# Altium PCB AQM with ESP32-S3.PcbDoc
Units mil, origin at the board's own origin, x right, y up, seen from the top; angles counter-clockwise.
Board outline 2620 x 2460 mil, 4 copper layers (Top Layer, Layer 1 - GND, Layer 2 - Power, Bottom Layer), stack 23.756 mil thick; 67 components, 54 nets, 235 pads, 1 vias.
Unrouted connection lines stored in the file: 162.
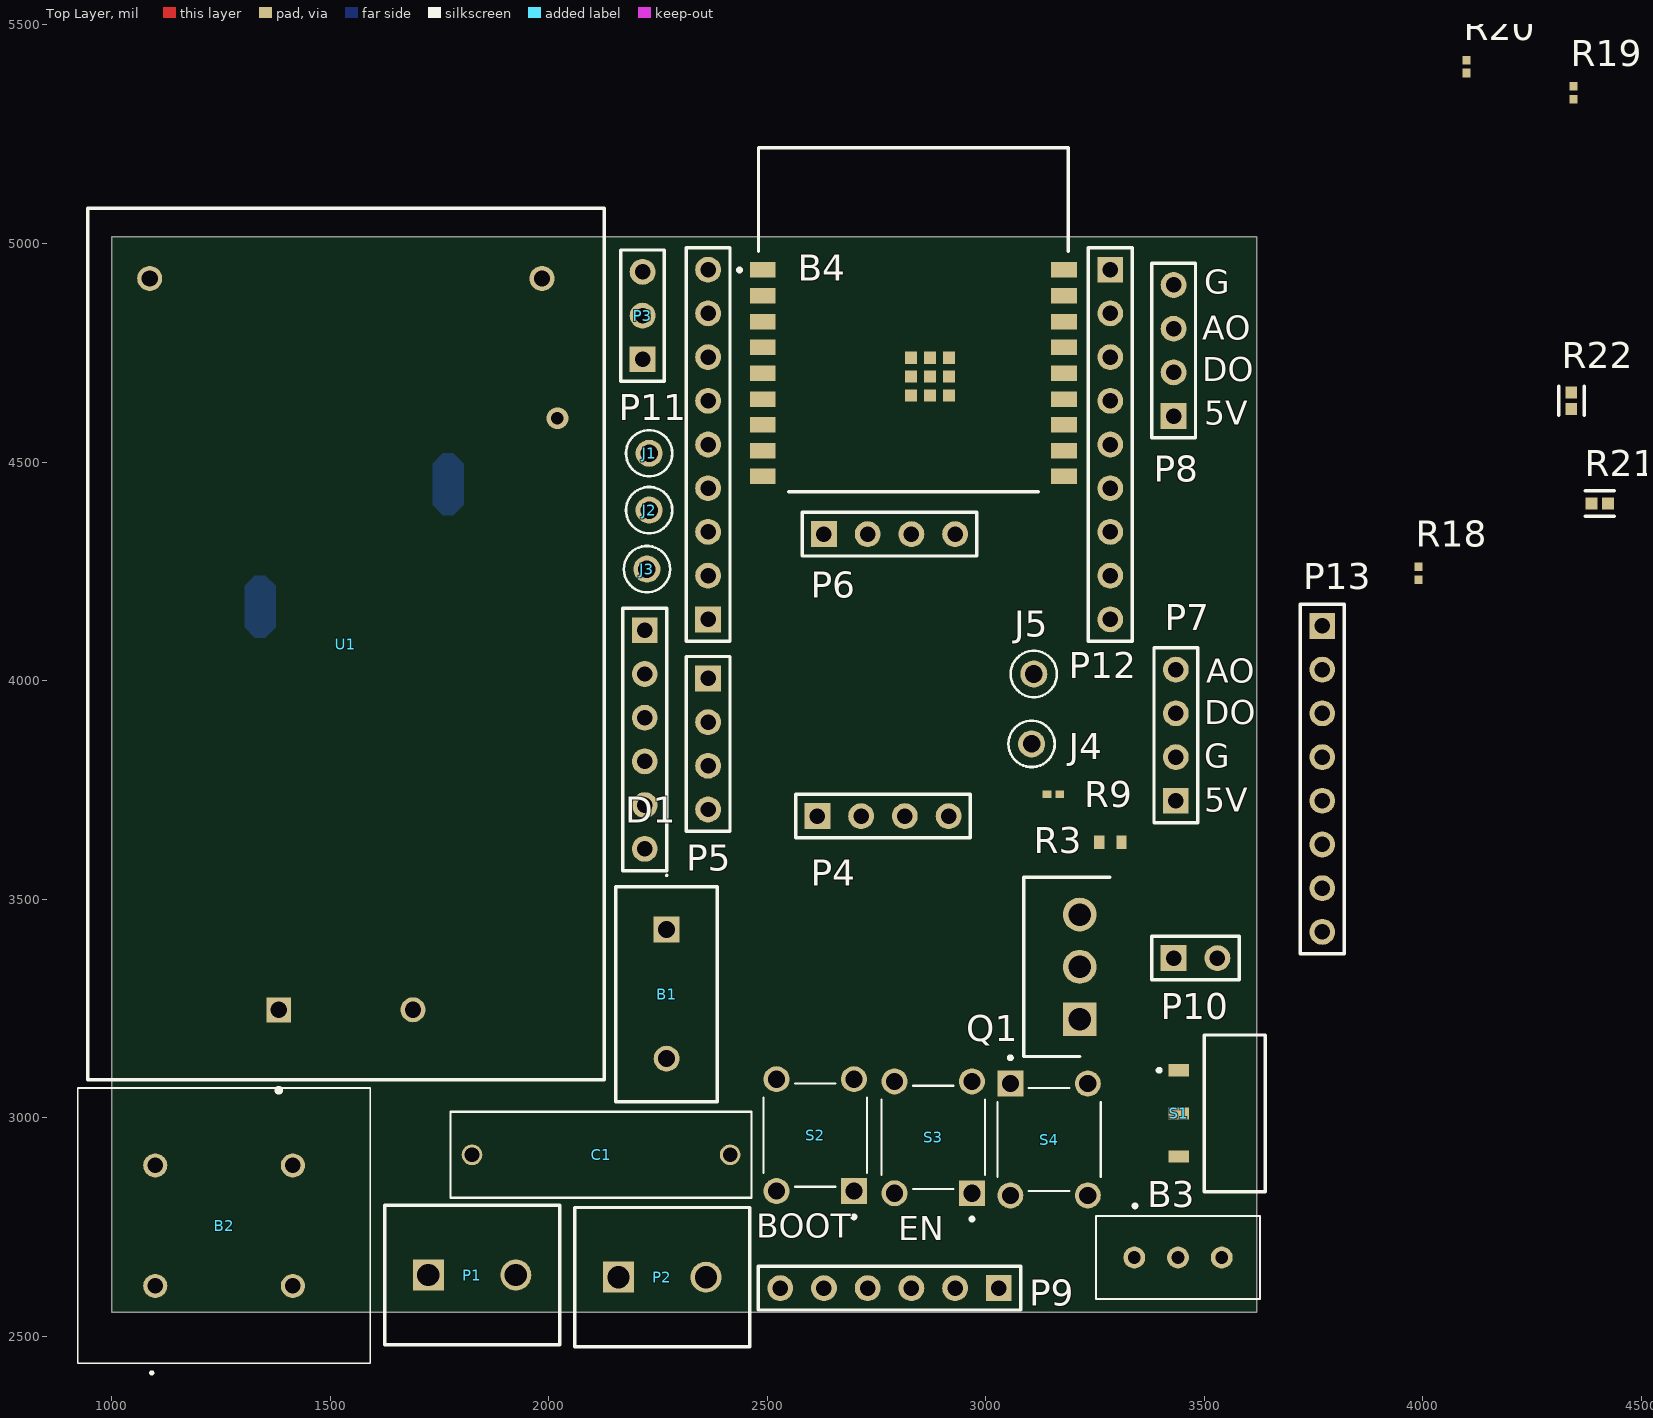
[diagram p0: Top Layer view]
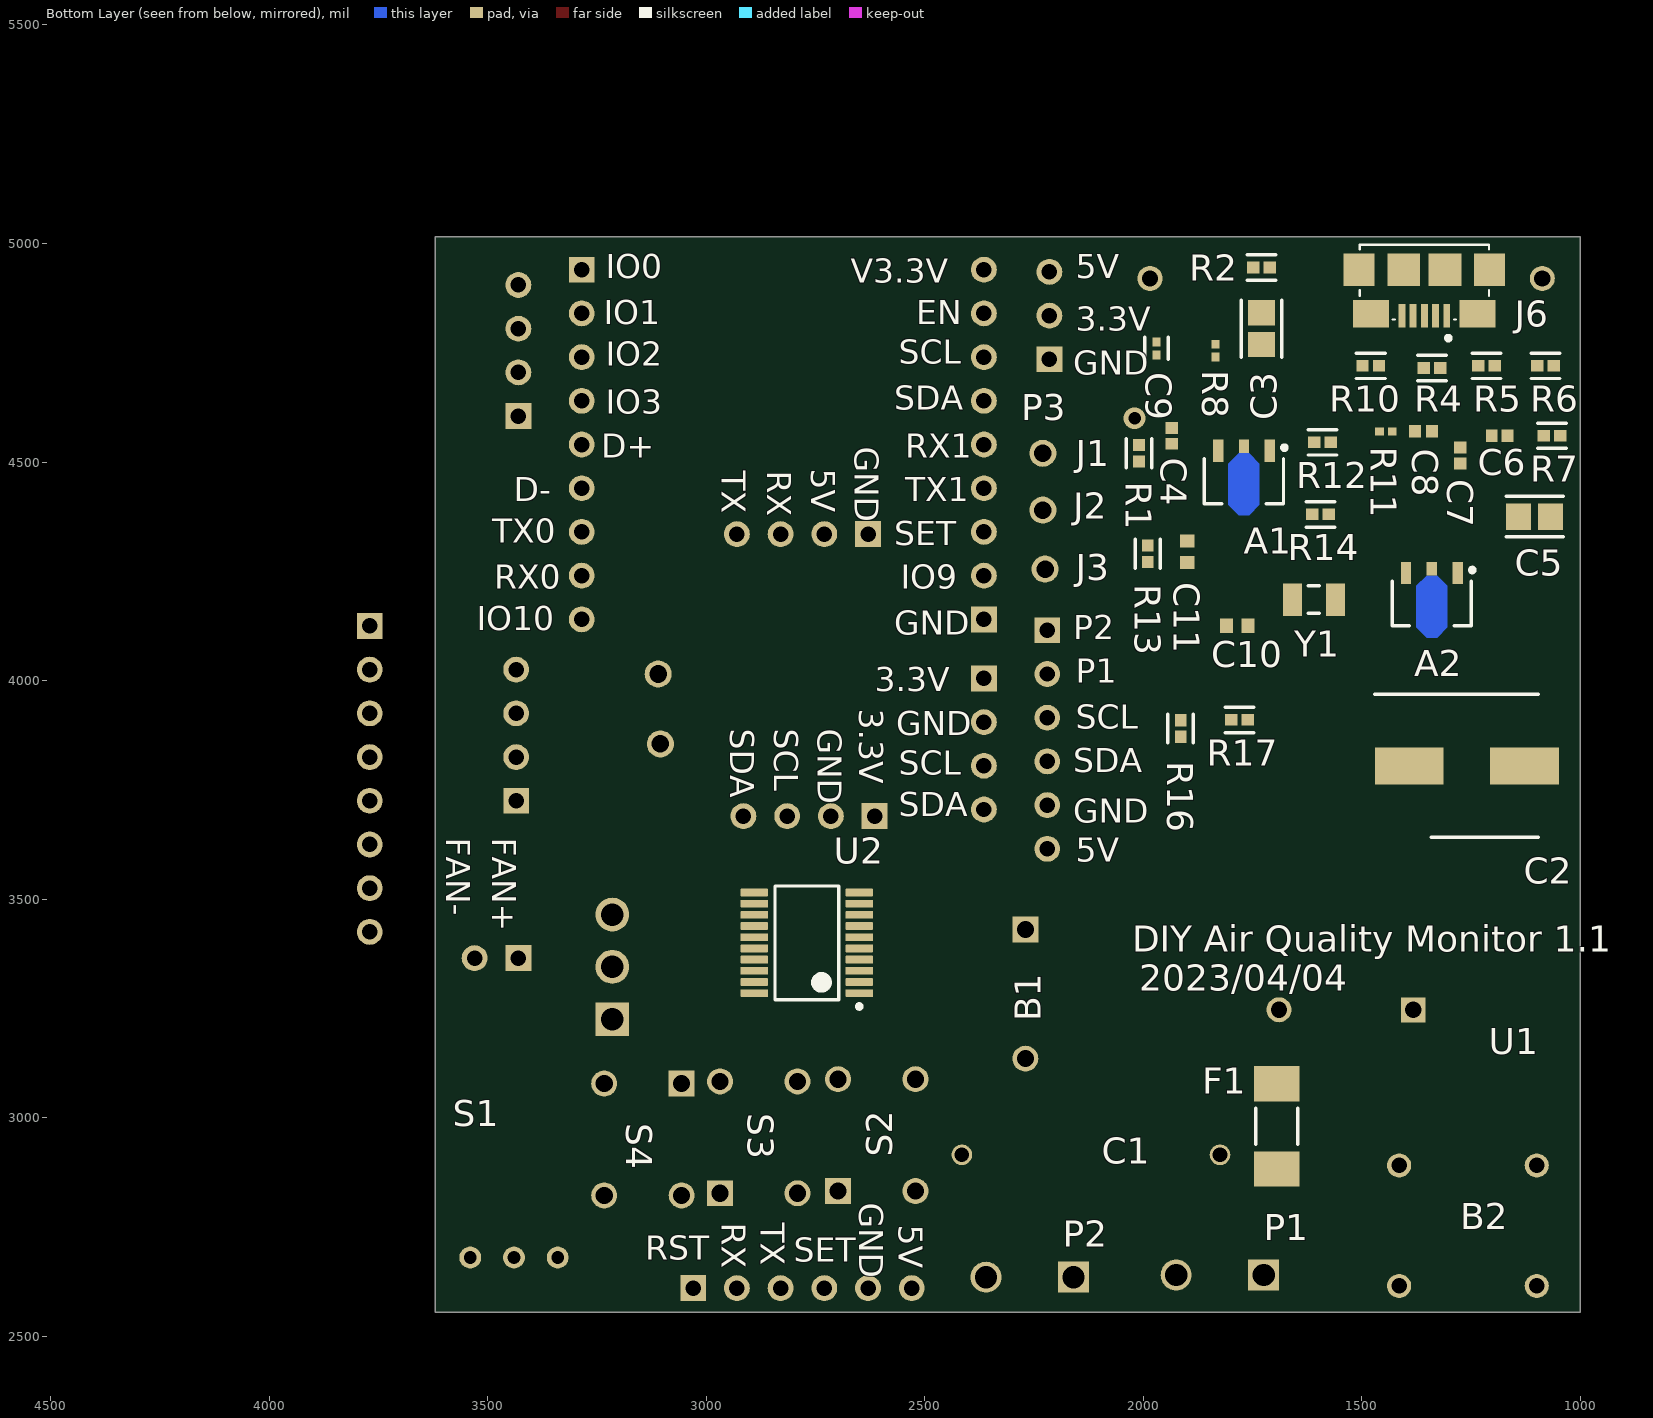
[diagram p1: Bottom Layer view, seen from below]

## Layer stack, top to bottom
Top Solder: solder mask 0.4, Solder Resist, Dk 3.5
Top Layer: signal copper 1.4
Dielectric 2: prepreg 2.8, PP-006, Dk 4.1
Layer 1 - GND: signal copper 1.378
Dielectric 1: dielectric 12.6, FR-4, Dk 4.8
Layer 2 - Power: signal copper 1.378
Dielectric 3: prepreg 2.8, PP-006, Dk 4.1
Bottom Layer: signal copper 1.4
Bottom Solder: solder mask 0.4, Solder Resist, Dk 3.5

## Board outline
1000,2555 3620,2555 3620,5015 1000,5015

## Design rules (kind name [scope] priority, off if disabled: settings)
Clearance [All] p1: gap=5.98 ignorepadtopadclearanceinfootprint=FALSE
MinimumSolderMaskSliver [All] p1: minsoldermaskwidth=0.98
PolygonConnect [All] p1: connectstyle=Relief reliefconductorwidth=10 reliefentries=4 polygonreliefangle="90 Angle" airgapwidth=10
RoutingVias [All] p1: holewidth=28 width=50 viastyle="Through Hole" minholewidth=28 minwidth=50 maxholewidth=28 maxwidth=50
SilkToSilkClearance [All] p1: silktosilkclearance=1
SilkToSolderMaskClearance [IsPad] p1: minsilkscreentomaskgap=5 clearancetoexposedcopper=TRUE
SolderMaskExpansion [All] p1: expansion=4
Width [All] p1: maxlimit=12.01 minlimit=5.98 preferedwidth=10
27 further rules are at their usual default settings.

## Classes and differential pairs
component class "esp32-c3 module": A2 B4 C5 C6 C7 C8 C9 C10 C11 J6 P11 P12 R4 R5 R6 R7 R8 R10 R12 R13 R14 R22 S2 S3 Y1
component class "AQM with esp32": A1 B1 B2 B3 C1 C2 C3 C4 D1 F1 J1 J2 J3 J4 J5 P1 P2 P3 P4 P5 P6 P7 P8 P9 P10 P13 Q1 R1 R2 R3 R9 R11 R16 R17 R18 R19 R20 R21 S1 S4 U1 U2

## Components (designator, comment, footprint, x,y, rotation, side; value= is the part's Value field where it differs from the comment)
A1 "IC1" SOT89-150P350X150-3N 1770,4465 r270 bottom
A2 "IC1" SOT89-150P350X150-3N 1340,4185 r270 bottom
B1 "10D561K" 10D561K 2270,3430.28 r270 top
B2 "UU9.8Y-10MH" UU98Y10MH 1100,2615 r270 top
B3 "3296X-1-103" 3296X1223LF 3440,2680 r270 top
B4 "ESP32-C3-WROOM-02-N4" ESP32C3WROOM02N4 2872.28,4695.24 r0 top
C1 "0.1uF" MPX-104K275VAC-C-D2 2120,2915 r180 top
C2 "220uF" CAPAE830X1050N 1260,3805 r180 bottom
C3 "22uF" FP-GRM219-0_2-0_15-IPC_A 1730,4805 r90 bottom
C4 "10uF" CL05A106MQ5NUNC 1935,4560 r270 bottom
C5 "22uF" FP-GRM219-0_2-0_15-IPC_A 1105,4375 r0 bottom
C6 "10uF" CL05A106MQ5NUNC 1185,4560 r0 bottom
C7 "10uF" CL05A106MQ5NUNC 1275,4515 r270 bottom
C8 "100nF" CAPC1050X55X23ML05T13 1359.29,4570 r0 bottom
C9 "1uF" FP-CL511-IPC_C 1970,4760 r270 bottom
C10 "12pF" CAPC1608X90X30LL10T20 1785,4125 r0 bottom
C11 "12pF" CAPC1608X90X30LL10T20 1900,4295 r90 bottom
D1 "Display" HDR1X6 2220,4115 r270 top
F1 "S6125-M2-0.5A" CAPC6125X25N 1695,2980 r90 bottom
J1 "5004" FP-5004-MFG 2230,4520 r0 top
J2 "5004" FP-5004-MFG 2230,4390 r0 top
J3 "5004" FP-5004-MFG 2225,4255 r0 top
J4 "5004" FP-5004-MFG 3105,3855 r0 top
J5 "5004" FP-5004-MFG 3110,4015 r0 top
J6 "10118192-0001LF" AMPHENOL_10118192-0001LF 1357.24,4834.69 r0 bottom
P1 "AC suppy" PHOE-1729128-2_V 1825,2640 r0 top
P2 "uv lamp" PHOE-1729128-2_V 2260,2635 r0 top
P3 "Header 3" HDR1X3 2215,4735 r90 top
P4 "Hum/Tem Sensor" HDR1X4 2615,3690 r0 top
P5 "CO2/VOC sensor" HDR1X4 2365,4005 r270 top
P6 "CH2O sensor" HDR1X4 2630,4335 r0 top
P7 "CO sensor" HDR1X4 3435,3725 r90 top
P8 "O3 sensor" HDR1X4 3430,4605 r90 top
P9 "PMS5003" HDR1X6 3030,2610 r180 top
P10 "5V FAN" HDR1X2 3430,3365 r0 top
P11 "Header 9" HDR1X9 2365,4140 r90 top
P12 "Header 9" HDR1X9 3285,4940 r270 top
P13 "Header 8" HDR1X8 3770,4125 r270 top
Q1 "2SD313" TO304P498X1010X2089-3P 3215,3225.32 r90 top
R1 "0R" FP-RC0402-0_4-IPC_A 2010,4520 r270 bottom
R2 "0R" FP-RC0402-0_4-IPC_A 1730,4945 r180 bottom
R3 "470Ω" RESC1608X55X25LL10T15 3285,3630 r180 top value=470O
R4 "0R" FP-RC0402-0_4-IPC_A 1340,4715 r180 bottom
R5 "0R" FP-RC0402-0_4-IPC_A 1215,4720 r180 bottom
R6 "0R" FP-RC0402-0_4-IPC_A 1080,4720 r180 bottom
R7 "0R" FP-RC0402-0_4-IPC_A 1065,4560 r0 bottom
R8 "10kΩ" RESC1005X40X25LL05T10 1835,4755 r270 bottom value=10kO
R9 "10kΩ" RESC1005X40X25LL05T10 3155,3740 r0 top value=10kO
R10 "0R" FP-RC0402-0_4-IPC_A 1480,4720 r0 bottom
R11 "10kΩ" RESC1005X40X25LL05T10 1445,4570 r0 bottom value=10kO
R12 "0R" FP-RC0402-0_4-IPC_A 1590,4545 r180 bottom
R13 "0R" FP-RC0402-0_4-IPC_A 1990,4290 r270 bottom
R14 "0R" FP-RC0402-0_4-IPC_A 1595,4380 r180 bottom
R16 "0R" FP-RC0402-0_4-IPC_A 1915,3890 r270 bottom
R17 "0R" FP-RC0402-0_4-IPC_A 1780,3910 r180 bottom
R18 "10kΩ" RESC1005X40X25LL05T10 3990,4245.24 r90 top value=10kO
R19 "10kΩ" RESC1005X40X25LL05T10 4345,5345 r90 top value=10kO
R20 "10kΩ" RESC1005X40X25LL05T10 4100,5404.76 r90 top value=10kO
R21 "0R" FP-RC0402-0_4-IPC_A 4405,4405 r0 top
R22 "0R" FP-RC0402-0_4-IPC_A 4340,4640 r90 top
S1 "Switch" SK3245SL1A 3570,3010 r270 top
S2 "TL1105AF160Q" TL1105AF160Q 2610,2960 r90 top
S3 "TL1105AF160Q" TL1105AF160Q 2880,2955 r90 top
S4 "TL1105AF160Q" TL1105AF160Q 3145,2950 r270 top
U1 "HLK-10M05" FP-HLK-10M05-MFG 1536.18,4083.39 r90 top
U2 "PCF8574APWR" PW0020A_M 2770,3400 r0 bottom
Y1 "32.768kHz" FP-ABS07-MFG 1610,4185 r180 bottom

## Footprints (in the part's own frame and the unit in brackets; to place one, negate y for a bottom-side part, rotate by r counter-clockwise, add the part's x,y. Pads: shape width x height; smd on the part's side, far side on the other; paste and mask are expansions set on the pad)
10D561K [mm]
  rect 1.5x1.5 hole 1: 1(0,0)
  round 1.5 hole 1: 2(7.5,0)
  silkscreen extent -3.2,-2.95 10,2.95, body extent -2.5,-2.95 10,2.95, height 15.6
3296X1223LF [mm]
  round 1.269 hole 0.74: 1(0,-2.54) 2(0,0) 3(0,2.54)
  silkscreen extent -3.1,-4.76 2.41,4.76, body extent -2.03,-4.83 2.8,6.22, height 10.03
AMPHENOL_10118192-0001LF [mm]
  rect 0.4x1.35 smd: 1(-1.3,0) 2(-0.65,0) 3(0,0) 4(0.65,0) 5(1.3,0)
  rect 2.1x1.6 smd: SH1(-3.1,-0.125) SH2(3.1,-0.125)
  rect 1.8x1.9 smd: SH3(-3.8,-2.675) SH6(3.8,-2.675)
  rect 1.9x1.9 smd: SH4(-1.2,-2.675) SH5(1.2,-2.675)
  silkscreen extent -3.75,-4.13 3.75,1.4, body extent -3.94,-4.99 3.98,0.67, height 3.09
CAPAE830X1050N [mm]
  rect 4x2.15 smd: 1(-3.35,0) 2(3.35,0)
  silkscreen extent -5.35,-4.15 4.15,4.15, body extent -4.65,-4.32 4.65,4.18, height 10.5
CAPC1050X55X23ML05T13 [mm] "Chip Capacitor, 2-Leads, Body 1.05x0.55mm, IPC Low Density"
  rect 0.69x0.72 smd: 1(-0.49,0) 2(0.49,0)
  body extent -0.53,-0.28 0.53,0.27, height 0.55
CAPC1608X90X30LL10T20 [mm] "Chip Capacitor, 2-Leads, Body 1.70x0.90mm, IPC High Density"
  rect 0.75x0.85 smd: 1(-0.625,0) 2(0.625,0)
  body extent -0.85,-0.45 0.85,0.45, height 0.9
CAPC6125X25N [mm] "Chip Capacitor, 2-Leads, Body 6.10x2.50mm, IPC Medium Density"
  rect 2.05x2.65 smd: 1(-2.475,0) 2(2.475,0)
  silkscreen extent -1.05,-1.22 1.05,1.23, body extent -3.15,-1.3 3.15,1.3, height 2.5
CL05A106MQ5NUNC [mm]
  rect 0.69x0.72 smd: 1(-0.46,0) 2(0.46,0)
  body extent -0.5,-0.25 0.5,0.25, height 0.7
ESP32C3WROOM02N4 [mm]
  rect 1.5x0.9 smd: 1(-9.71,6.2) 2(-9.71,4.7) 3(-9.71,3.2) 4(-9.71,1.7) 5(-9.71,0.2) 6(-9.71,-1.3) 7(-9.71,-2.8) 8(-9.71,-4.3) 9(-9.71,-5.8) 10(7.79,-5.8) 11(7.79,-4.3) 12(7.79,-2.8) 13(7.79,-1.3) 14(7.79,0.2) 15(7.79,1.7) 16(7.79,3.2) 17(7.79,4.7) 18(7.79,6.2)
  rect 0.7x0.7 smd: 19(0,0) 20(1.1,0) 21(1.1,1.1) 22(0,1.1) 23(-1.1,1.1) 24(-1.1,0) 25(-1.1,-1.1) 26(0,-1.1) 27(1.1,-1.1)
  silkscreen extent -11.16,-6.7 8.04,13.3, body extent -10.14,-6.73 7.86,13.27, height 1.6
FP-5004-MFG [mm]
  round 1.57 hole 1.02 paste-1000 mask+0: 1(0,0)
  silkscreen extent -1.35,-1.34 1.35,1.34, body extent -1.45,-1.45 1.45,1.45, height 0.25
FP-ABS07-MFG [mm]
  rect 1.1x1.9 smd paste+0 mask+0: 1(-1.25,0) 2(1.25,0)
  silkscreen extent -0.33,-0.8 0.33,0.8, body extent -1.6,-0.75 1.6,0.75, height 0.9
FP-CL511-IPC_C [mil]
  rect 20.29x18.6 smd paste+0 mask+0: 1(-14.9,0) 2(14.9,0)
  silkscreen extent -25,-27 25,27, body extent -20,-10 20,10, height 22
FP-GRM219-0_2-0_15-IPC_A [mil]
  rect 57.27x61.27 smd paste+0 mask+0: 1(-36.45,0) 2(36.45,0)
  silkscreen extent -65,-46 65,46, body extent -39,-25 39,25, height 39
FP-HLK-10M05-MFG [mm]
  rect 1.45x1.45 hole 0.95 paste-1000 mask+0: 1(-21.25,3.9)
  round 1.45 hole 0.95 paste-1000 mask+0: 2(-21.25,-3.9) 3(21.25,11.4) 4(21.25,-11.4)
  silkscreen extent -26.05,-15.01 25.33,15.01, body extent -25.43,-15.11 25.43,15.11, height 0.25
FP-RC0402-0_4-IPC_A [mil]
  rect 28.16x26.48 smd paste+0 mask+0: 1(-18.84,0) 2(18.84,0)
  silkscreen extent -33,-29 33,29, body extent -20,-10 20,10, height 16
HDR1X2 [mm] "Connector; Header; 2 Position"
  rect 1.5x1.5 hole 0.9: 1(0,0)
  round 1.5 hole 0.9: 2(2.54,0)
  silkscreen extent -1.27,-1.27 3.81,1.27
HDR1X3 [mm] "Connector; Header; 3 Position"
  rect 1.5x1.5 hole 0.9: 1(0,0)
  round 1.5 hole 0.9: 2(2.54,0) 3(5.08,0)
  silkscreen extent -1.27,-1.27 6.35,1.27
HDR1X4 [mm] "Connector; Header; 4 Position"
  rect 1.5x1.5 hole 0.9: 1(0,0)
  round 1.5 hole 0.9: 2(2.54,0) 3(5.08,0) 4(7.62,0)
  silkscreen extent -1.27,-1.27 8.89,1.27
HDR1X6 [mm] "Connector; Header; 6 Position"
  rect 1.5x1.5 hole 0.9: 1(0,0)
  round 1.5 hole 0.9: 2(2.54,0) 3(5.08,0) 4(7.62,0) 5(10.16,0) 6(12.7,0)
  silkscreen extent -1.27,-1.27 13.97,1.27
HDR1X8 [mm] "Connector; Header; 8 Position"
  rect 1.5x1.5 hole 0.9: 1(0,0)
  round 1.5 hole 0.9: 2(2.54,0) 3(5.08,0) 4(7.62,0) 5(10.16,0) 6(12.7,0) 7(15.24,0) 8(17.78,0)
  silkscreen extent -1.27,-1.27 19.05,1.27
HDR1X9 [mm] "Connector; Header; 9 Position"
  rect 1.5x1.5 hole 0.9: 1(0,0)
  round 1.5 hole 0.9: 2(2.54,0) 3(5.08,0) 4(7.62,0) 5(10.16,0) 6(12.7,0) 7(15.24,0) 8(17.78,0) 9(20.32,0)
  silkscreen extent -1.27,-1.27 21.59,1.27
MPX-104K275VAC-C-D2 [mm]
  round 1.2 hole 0.85: 1(-7.5,0) 2(7.5,0)
  silkscreen extent -8.75,-2.5 8.75,2.5, body extent -8.75,-2.5 8.75,2.5, height 12
PHOE-1729128-2_V [mm] "Receptacle, 2-Leads, Body 8.1x10.16mm, Pitch 5.08mm"
  rect 1.8x1.8 hole 1.3: 1(-2.54,0)
  round 1.8 hole 1.3: 2(2.54,0)
  silkscreen extent -5.08,-4.05 5.08,4.05, body extent -5.65,-4.05 5.08,4.05, height 10.01
PW0020A_M [mm] "SOP, 20-Leads, Body 6.6x4.5mm, Pitch 0.65mm, IPC Low Density"
  rrect22% 1.6x0.45 smd: 1(-3.05,2.925) 2(-3.05,2.275) 3(-3.05,1.625) 4(-3.05,0.975) 5(-3.05,0.325) 6(-3.05,-0.325) 7(-3.05,-0.975) 8(-3.05,-1.625) 9(-3.05,-2.275) 10(-3.05,-2.925) 11(3.05,-2.925) 12(3.05,-2.275) 13(3.05,-1.625) 14(3.05,-0.975) 15(3.05,-0.325) 16(3.05,0.325) 17(3.05,0.975) 18(3.05,1.625) 19(3.05,2.275) 20(3.05,2.925)
  silkscreen extent -3.17,-3.3 1.85,3.82, body extent -3.21,-3.25 3.21,3.25, height 1
RESC1005X40X25LL05T10 [mm] "Chip Resistor, 2-Leads, Body 1.00x0.50mm, IPC High Density"
  rect 0.5x0.45 smd: 1(-0.375,0) 2(0.375,0)
  body extent -0.53,-0.27 0.53,0.28, height 0.4
RESC1608X55X25LL10T15 [mm] "Chip Resistor, 2-Leads, Body 1.70x0.90mm, IPC High Density"
  rect 0.6x0.8 smd: 1(-0.65,0) 2(0.65,0)
  body extent -0.85,-0.45 0.85,0.45, height 0.55
SK3245SL1A [mm]
  rect 0.7x1.2 smd: 1(-2.5,-3.25) 2(0,-3.25) 3(2.5,-3.25)
  silkscreen extent -4.55,-4.5 4.55,1.78, body extent -4.55,-3.62 4.55,3.88, height 3.2
SOT89-150P350X150-3N [mm] "SOT89, 3-Leads, Body 4.50x2.50mm, Pitch 1.50mm, Lead Span 3.5mm, IPC Medium Density"
  rect 1.3x0.6 smd: 1(-1.55,1.5) 3(-1.55,-1.5)
  rect 0.8x0.6 smd: 2(-1.8,0)
  Top Layer region: -1.4,0.3 -0.8,0.9 1.6,0.9 2.2,0.3 2.2,-0.3 1.6,-0.9 -0.8,-0.9 -1.4,-0.3
  silkscreen extent -1.85,-2.3 1.53,2.47, body extent -2.02,-2.27 2.23,2.27, height 1.5
TL1105AF160Q [mm]
  rect 1.508x1.508 / inner round 1.508 / far side rect 1.508x1.508 hole 1: 1(-3.25,-2.25)
  round 1.508 hole 1: 2(3.25,-2.25) 3(-3.25,2.25) 4(3.25,2.25)
  silkscreen extent -4.85,-3 3,3, body extent -3.82,-2.62 4.07,3.38, height 3.21
TO304P498X1010X2089-3P [mm]
  rect 1.965x1.965 / inner round 1.965 / far side rect 1.965x1.965 hole 1.31: 1(0,0)
  round 1.965 hole 1.31: 2(3.04,0) 3(6.08,0)
  silkscreen extent -2.17,-1.74 8.25,3.24, body extent -1.91,-3.3 8.19,1.68, height 19.12
UU98Y10MH [mm]
  round 1.4 hole 0.9: 1(0,0) 2(-7,0) 3(-7,8) 4(0,8)
  silkscreen extent -11.5,-4.5 5.1,12.5, body extent -11.5,-4.5 4.5,12.5, height 14.1

## Part data
A1 A2: library part IC?, "75dB@(120Hz) 1A 1.25V@(1A) ±125?@(Tj) Fixed 3.3V~3.3V Positive 1 20V SOT-89 Linear Voltage Regulators (LDO) ROHS", LCSC Part #=C2904742, Manufacturer=YONGYUTAI, Mfr. Part #=AMS1117-3.3, Package=SOT-89, Datasheet=https://datasheet.lcsc.com/lcsc/2110121330_YONGYUTAI-AMS1117-3-3_C2904742.pdf
B1: "920V 42.3J 180pF@1kHz 460V 350V 504V~616V 2.5kA Plugin Varistors ROHS", LCSC Part #=C113236, Manufacturer="Hongzhi Elec", Package=Plugin, Datasheet=https://datasheet.lcsc.com/lcsc/1811141751_Hongzhi-Elec-10D561K_C113236.pdf, Mfr. Part #=10D561K
B2: "10mH@1kHz 1.2O 2 500mA 50V Plugin Common Mode Filters ROHS", LCSC Part #=C75192, Manufacturer="FH (Guangdong Fenghua Advanced Tech)", Package=Plugin, Datasheet=https://datasheet.lcsc.com/lcsc/1810311213_FH--Guangdong-Fenghua-Advanced-Tech-UU9-8Y-10mH_C75192.pdf, Mfr. Part #=UU9.8Y-10MH
B3: "±10% 10kO Plugin Variable Resistors/Potentiometers ROHS", LCSC Part #=C118955, Manufacturer="BOCHEN(Chengdu Guosheng Tech)", Package=Plugin, Datasheet=https://datasheet.lcsc.com/lcsc/1811011704_BOCHEN-Chengdu-Guosheng-Tech-3296X-1-103_C118955.pdf, Mfr. Part #=3296X-1-103
B4: "WiFi Modules (802.11) (Engineering Samples) SMD module, ESP32-C3, 4MB SPI flash, PCB antenna, -40 C +85 C", LCSC Part #=C2934560, Manufacturer="Espressif Systems", Datasheet=https://www.espressif.com/sites/default/files/documentation/esp32-c3-wroom-02_datasheet_en.pdf, Mfr. Part #=ESP32-C3-WROOM-02-N4
C1: library part MPX-104K275VAC-C-D2, "X2 100nF ±10% 275V Plugin,P=15mm Suppression Capacitors ROHS", LCSC Part #=C914484, Manufacturer=NDF, Mfr. Part #=X2-104K-275VAC, Package=Plugin,P=15mm, Datasheet=https://datasheet.lcsc.com/lcsc/2201131300_NDF-X2-104K-275VAC_C914484.pdf
C2: library part UUR1C221MNL1GS, "-40?~+85? 2000hrs@85? 220uF 10mm 16V 8mm 215mA@120Hz ±20% SMD,D8xL10mm Aluminum Electrolytic Capacitors - SMD ROHS", LCSC Part #=C445237, Manufacturer=Nichicon, Package=SMD,D8xL10mm, Datasheet=https://datasheet.lcsc.com/lcsc/2002121532_Nichicon-UUR1C221MNL1GS_C445237.pdf, Mfr. Part #=UUR1C221MNL1GS
C3 C5: library part CMP-06035-056251-1, "Chip Multilayer Ceramic Capacitors for General Purpose, 0805, 22uF, X5R, 15%, 20%, 16V", LCSC Part #=C162295, Manufacturer="Murata Electronics", Mfr. Part #=GRM219R61C226ME15L, Package=0805, Datasheet=https://datasheet.lcsc.com/lcsc/1811141821_Murata-Electronics-GRM219R61C226ME15L_C162295.pdf
C4 C6 C7: library part CL05A106MQ5NUNC, "6.3V 10uF X5R ±20% 0402 Multilayer Ceramic Capacitors MLCC - SMD/SMT ROHS", LCSC Part #=C15525, Manufacturer="Samsung Electro-Mechanics", Package=0402, Datasheet Link=https://datasheet.datasheetarchive.com/originals/distributors/Datasheets-DGA10/2406160.pdf, Mfr. Part #=CL05A106MQ5NUNC
C8: library part CMP-2000-05439-1, "X7R 100nF 16V ±10% 0402 Multilayer Ceramic Capacitors MLCC - SMD/SMT ROHS", LCSC Part #=C1525, Manufacturer="Samsung Electro-Mechanics", Mfr. Part #=CL05B104KO5NNNC, Package=0402, Datasheet=https://datasheet.lcsc.com/lcsc/1810191219_Samsung-Electro-Mechanics-CL05B104KO5NNNC_C1525.pdf
C9: library part CMP-13271-001936-1, "X5R 10V 1uF ±10% 0402 Multilayer Ceramic Capacitors MLCC - SMD/SMT ROHS", LCSC Part #=C14445, Manufacturer="Samsung Electro-Mechanics", Mfr. Part #=CL05A105KP5NNNC, Package=0402, Datasheet=https://datasheet.lcsc.com/lcsc/1810191214_Samsung-Electro-Mechanics-CL05A105KP5NNNC_C14445.pdf
C10 C11: library part CMP-2000-06098-1, "50V 12pF C0G ±5% 0603 Multilayer Ceramic Capacitors MLCC - SMD/SMT ROHS", LCSC Part #=C38523, Manufacturer="Samsung Electro-Mechanics", Mfr. Part #=CL10C120JB8NNNC, Package=0603, Datasheet=https://datasheet.lcsc.com/lcsc/1810261515_Samsung-Electro-Mechanics-CL10C120JB8NNNC_C38523.pdf
D1: library part "Header 6", "Header, 6-Pin", LatestRevisionDate=17-Jul-2002, LatestRevisionNote="Re-released for DXP Platform.", Publisher="Altium Limited"
F1: "SMD Fuses ROHS", LCSC Part #=C845172, Manufacturer="SART(Nanjing Sart Tech)", Package=SMD, Datasheet=https://datasheet.lcsc.com/lcsc/2201242130_SART-Nanjing-Sart-Tech-S6125-M2-0-5A_C845172.pdf, Mfr. Part #=S6125-M2-0.5A
J1 J2 J3 J4 J5: library part CMP-2000-05575-2, "PC TEST POINT MINIATURE YELLOW", LCSC Part #=C2906762, Manufacturer=Keystone, ComponentLink2Description=Datasheet, ComponentLink2URL=https://www.keyelco.com/product-pdf.cfm?p=1313, Datasheet=https://datasheet.lcsc.com/lcsc/2201121200_Keystone-5004_C2906762.pdf, Mfr. Part #=5004, Package=5004
J6: "Single Port 5 Contact Horizontal Right Angle Shielded Micro B USB 2.0 Connector", LCSC Part #=C132564, Manufacturer="Amphenol ICC", Package=SMD, Datasheet=https://datasheet.lcsc.com/lcsc/2111290930_Amphenol-ICC-10118192-0001LF_C132564.pdf, Mfr. Part #=10118192-0001LF
P1 P2: library part CMP-2000-05815-1, "13.5A 400V Green Straight pin 5.08mm 1 2 Plugin,P=5.08mm Screw terminal ROHS", LCSC Part #=C91153, Manufacturer="Phoenix Contact", Mfr. Part #=1729128, Package=Plugin,P=5.08mm, Datasheet=https://www.farnell.com/datasheets/2617011.pdf
P3: "Header, 3-Pin", LatestRevisionDate=17-Jul-2002, LatestRevisionNote="Re-released for DXP Platform.", Publisher="Altium Limited"
P4: library part "Header 4", "Si7021 Header, 4-Pin"
P5: library part "Header 4", "SGP30 Header, 4-Pin", LatestRevisionDate=17-Jul-2002, LatestRevisionNote="Re-released for DXP Platform.", Publisher="Altium Limited"
P6: library part "Header 4", "- Sensor Modules ROHS", LCSC Part #=C141344, Manufacturer="Zhengzhou Winsen Elec Tech", Mfr. Part #=ZE08-CH2O
P7: library part "Header 4", "MQ7 Header, 4-Pin", LatestRevisionDate=17-Jul-2002, LatestRevisionNote="Re-released for DXP Platform.", Publisher="Altium Limited"
P8: library part "Header 4", "MQ131 Header, 4-Pin", LatestRevisionDate=17-Jul-2002, LatestRevisionNote="Re-released for DXP Platform.", Publisher="Altium Limited"
P9: library part "Header 6", "PMS5003 Sensor Modules ROHS", LCSC Part #=C91431, Manufacturer="Beijing Plantower", Datasheet=https://datasheet.lcsc.com/lcsc/1810251510_Beijing-Plantower-PMS5003_C91431.pdf, Mfr. Part #=PMS5003, Package=PMS5003
P10: library part "Header 2", "Header, 2-Pin", LatestRevisionDate=17-Jul-2002, LatestRevisionNote="Re-released for DXP Platform.", Publisher="Altium Limited"
P11 P12: "Header, 9-Pin", LatestRevisionDate=17-Jul-2002, LatestRevisionNote="Re-released for DXP Platform.", Publisher="Altium Limited"
P13: "Header, 8-Pin", LatestRevisionDate=17-Jul-2002, LatestRevisionNote="Re-released for DXP Platform.", Publisher="Altium Limited"
Q1: "NPN Transistor, TO-220", LCSC Part #=C3031919, Manufacturer="Jiangsu Changjing Electronics Technology Co., Ltd.", Package=TO-220, Datasheet=https://datasheet.lcsc.com/lcsc/2206081730_Jiangsu-Changjing-Electronics-Technology-Co---Ltd--2SD313_C3031919.pdf, Mfr. Part #=2SD313
R1 R2 R4 R5 R6 R7 R10 R12 R13 R14 R16 R17 R21 R22: library part CMP-2002-07342-2, "RES SMD 0 OHM JUMPER 1/16W 0402", LCSC Part #=C106231, Manufacturer=Yageo, Mfr. Part #=RC0402FR-070RL, Package=0402, Datasheet=https://www.lcsc.com/product-detail/Chip-Resistor-Surface-Mount_YAGEO-RC0402FR-070RL_C106231.html
R3: library part CMP-1659-00035-2, "100mW Thick Film Resistors 75V ±100ppm/? ±1% -55?~+155? 470O 0603 Chip Resistor - Surface Mount ROHS", LCSC Part #=C114669, Manufacturer=YAGEO, Mfr. Part #=RC0603FR-07470RL, Package=0603, ComponentLink1Description="Manufacturer URL", ComponentLink1URL=http://www.yageo.com/, ComponentLink2Description=Datasheet, ComponentLink2URL=https://datasheet.ciiva.com/11808/0900766b80f96399-11808177.pdf, Datasheet=https://datasheet.lcsc.com/lcsc/1810161617_YAGEO-RC0603FR-07470RL_C114669.pdf
R8 R9 R11 R18 R19 R20: library part CMP-2002-07353-1, "50V 10kO Thick Film Resistors 62.5mW ±1% -55?~+155? ±100ppm/? 0402 Chip Resistor - Surface Mount ROHS", LCSC Part #=C60490, Manufacturer=YAGEO, Mfr. Part #=RC0402FR-0710KL, Package=0402
S1: library part SK-3245S-L1-A, "Surface Mount 50mA DPDT 3.2mm 12V 9.1mm 12V 3.55mm 50mA 10000 SMDSplicing Rectangular columnar -40?~+85? Black SMD Slide Switches ROHS", LCSC Part #=C405951, Manufacturer="XKB Connectivity", Package=SMD, Datasheet=https://datasheet.lcsc.com/lcsc/2002271841_XKB-Connectivity-SK-3245S-L1-A_C405951.pdf, Mfr. Part #=SK-3245S-L1-A
S2 S3 S4: "6mm 1.4mm Round Button 50mA Straight 6mm SPST 12V Plugin,6x6mm Tactile Switches ROHS", LCSC Part #=C273465, Manufacturer=E-Switch, Package=Plugin,6x6mm, Datasheet=https://datasheet.lcsc.com/lcsc/1809291031_E-Switch-TL1105AF160Q_C273465.pdf, Mfr. Part #=TL1105AF160Q
U1: library part CMP-218581-000001-1, "5V 2A 90VAC~265VAC 1 120V~350V Isolated Regulated 10W AC-DC 80% Plugin Power Modules ROHS", LCSC Part #=C403745, Manufacturer=HI-LINK, Package=Plugin, Mfr. Part #=HLK-10M05
U2: library part CMP-0314-00336-2, "Remote 8-Bit I/O Expander for I2C-Bus, 2.5 to 6 V, -40 to 85 degC, 20-pin TSSOP (PW), Green (RoHS & no Sb/Br)", Manufacturer="Texas Instruments", Max Frequency(kHz)=100, Voltage Nodes(V)="5, 3.3", # of I/Os=8, Code_JEDEC=MO-153, ComponentLink1Description=Datasheet, ComponentLink1URL=http://www.ti.com/general/docs/lit/getliterature.tsp?genericPartNumber=PCF8574A&fileType=pdf, DatasheetVersion=SCPS069D, Eco-Plan="Green (RoHS & no Sb/Br)", fSCLK(Max)(MHz)=0.1, I2C Address="0111 xxx", Interrupt Output=Yes, Mounting Technology="Surface Mount", PackageDescription="20-Pin Plastic Thin Small Outline Package 6.5 x 4.4 mm Body ,0.65 mm Pitch", PackageReference=PW0020A, PackageVersion="revG, Feb-2011", PartNumber=PCF8574APWR, Push-Pull I/O Type=Yes, Reset Input=No, SubFamily="I2C IO Expander", VCC(Max)(V)=6, VCC(Min)(V)=2.5, Vcc range(V)="2.5 to 6.0"
Y1: library part CMP-0447-00001-4, "-40?~+85? 32.768kHz 12.5pF 70kO ±20ppm SMD3215-2P Crystals ROHS", LCSC Part #=C130253, Manufacturer="Abracon LLC", Mfr. Part #=ABS07-32.768KHZ-T, Package=SMD3215-2P, Datasheet=https://datasheet.lcsc.com/lcsc/1809211224_Abracon-LLC-ABS07-32-768KHZ-T_C130253.pdf

## Via types
v1: diameter 50, hole 28, Top Layer to Bottom Layer, 1 vias

## Nets (pads, with @x,y where several pads share a name; then routed paths per layer and width w, separated by ;. In a path a pad name is that pad's centre, name@x,y a point inside that pad or via, vN(x,y) a via of type N, cw(c..) or ccw(c..) an arc to the next point about the centre after c; other vN are vias at no path point)
3.3V: J3.1 P3.2 P4.1 P5.1 R2.1
5V: C2.1 D1.6 J2.1 P3.3 P6.2 P7.1 P8.1 P9.6 R1.2 R18.1 R19.1 R20.1 S1.2 U1.4 U2.5
D+: B4.14 P12.5 R4.2
D-: B4.13 P12.6 R5.2
DOUT1: J4.1 P7.3
DOUT2: J5.1 P8.2
EN: B4.2 C9.1 P11.8 R8.2 S3.3 S3.4
GND: A1.1 A2.1 B3.1 B4.9 B4.19 B4.20 B4.21 B4.22 B4.23 B4.24 B4.25 B4.26 B4.27 C2.2 C3.2 C4.1 C5.2 C6.1 C7.2 C8.2 C9.2 C10.2 C11.2 D1.5 J1.1 J6.5 J6.SH1 J6.SH2 J6.SH3 J6.SH4 J6.SH5 J6.SH6 P3.1 P4.2 P5.2 P6.1 P7.2 P8.4 P9.5 P10.2 P11.1 R10.2 S2.1 S2.2 S3.1 S3.2 S4.3 S4.4 U1.3 U2.6 U2.7 U2.9 U2.15
IO0: B4.18 P12.1 R13.1
IO1: B4.17 P12.2 R12.1
IO2: B4.16 P8.3 P12.3
IO3: B4.15 P7.4 P12.4
IO8: P11.3 R20.2 R21.2 R22.2
IO9: B4.8 P11.2 S2.3 S2.4
IO10: B4.10 P12.9
NetA1_2: A1.2 C3.1 R2.2
NetA1_3: A1.3 C4.2 R1.1
NetA2_2: A2.2 C5.1 R7.1
NetA2_3: A2.3 C6.2 R6.1
NetB1_1: B1.1 B2.1 C1.1 F1.2
NetB1_2: B1.2 B2.4 C1.2 P1.1 P2.1
NetB2_2: B2.2 U1.1
NetB2_3: B2.3 U1.2
NetB3_2: B3.2 Q1.1
NetB3_3: B3.3 R3.1
NetB4_7: B4.7 R22.1
NetC10_1: C10.1 R12.2 R14.2 Y1.2
NetC11_1: C11.1 R13.2 R14.1 Y1.1
NetF1_1: F1.1 P1.2 P2.2
NetJ6_2: J6.2 R5.1
NetJ6_3: J6.3 R4.1
NetP9_4: P9.4 R16.2
NetP10_1: P10.1 Q1.3
NetQ1_2: Q1.2 R3.2 S1.3
NetR11_2: R11.2 R17.2
NetR21_1: R21.1 U2.1
"OTG ID": J6.4 R10.1
P0: P13.1 R16.1 R17.1 U2.10
P1: D1.2 P13.2 U2.11
P2: D1.1 P13.3 U2.12
P3: P13.4 U2.14
P4: P13.5 U2.16
P5: P13.6 U2.17
P6: P13.7 U2.19
P7: P13.8 U2.20
RST: P9.1 R9.2 S4.1 S4.2
RX0: B4.11 P9.2 P12.8
RX1: B4.5 P6.3 P11.5
SCL: B4.3 D1.3 P4.3 P5.3 P11.7 R18.2 U2.2
SDA: B4.4 D1.4 P4.4 P5.4 P11.6 R19.2 U2.4
TX0: B4.12 P9.3 P12.7
TX1: B4.6 P6.4 P11.4
VDD3.3V: B4.1 C7.1 C8.1 P11.9 R7.2 R8.1 R9.1 R11.1
VUSB: J6.1 R6.2
pads on no net: S1.1 U2.3 U2.8 U2.13 U2.18
copper on no net:
  other v1: 2020,4600

## Silkscreen, mask and mechanical layers (free items; w line width, h text height)
Top Overlay:
  text "G" at 3500,4885 h55
  text "AO" at 3495,4780 h55
  text "DO" at 3495,4685 h55
  text "5V" at 3500,4585 h55
  text "AO" at 3505,3995 h55
  text "DO" at 3500,3900 h55
  text "G" at 3500,3800 h55
  text "5V" at 3500,3700 h55
  text "BOOT" at 2475,2725 h55
  text "EN" at 2800,2720 h55
Bottom Overlay:
  text "5V" at 2155,4920 h55
  text "IO0" at 3230,4920 h55
  text "V3.3V" at 2670,4910 h55
  text "EN" at 2520,4815 h55
  text "IO1" at 3235,4815 h55
  text "3.3V" at 2155,4800 h55
  text "SCL" at 2560,4725 h55
  text "IO2" at 3230,4720 h55
  text "GND" at 2160,4700 h55
  text "SDA" at 2570,4620 h55
  text "IO3" at 3230,4610 h55
  text "GND" at 2660,4535 h55 r90
  text "RX1" at 2545,4510 h55
  text "D+" at 3240,4510 h55
  text "5V" at 2760,4485 h55 r90
  text "RX" at 2860,4480 h55 r90
  text "TX" at 2965,4480 h55 r90
  text "TX1" at 2545,4410 h55
  text "D-" at 3440,4410 h55
  text "TX0" at 3490,4315 h55
  text "SET" at 2570,4310 h55
  text "IO9" at 2555,4210 h55
  text "RX0" at 3485,4210 h55
  text "IO10" at 3525,4115 h55
  text "GND" at 2570,4105 h55
  text "P2" at 2160,4095 h55
  text "P1" at 2155,3995 h55
  text "3.3V" at 2615,3975 h55
  text "3.3V" at 2650,3935 h55 r90
  text "SCL" at 2155,3890 h55
  text "GND" at 2745,3890 h55 r90
  text "SCL" at 2845,3890 h55 r90
  text "SDA" at 2945,3890 h55 r90
  text "GND" at 2565,3875 h55
  text "SDA" at 2160,3790 h55
  text "SCL" at 2560,3785 h55
  text "SDA" at 2560,3690 h55
  text "GND" at 2160,3675 h55
  text "FAN+" at 3490,3640 h55 r90
  text "FAN-" at 3595,3640 h55 r90
  text "5V" at 2155,3585 h55
  text "DIY Air Quality Monitor 1.1" at 2025,3380 h60
  text "2023/04/04" at 2010,3290 h60
  text "GND" at 2650,2805 h55 r90
  text "TX" at 2875,2760 h55 r90
  text "RX" at 2965,2760 h55 r90
  text "5V" at 2560,2755 h55 r90
  text "RST" at 3140,2675 h55
  text "SET" at 2800,2670 h55
Mechanical 1:
  lines w10: 754.82,2635 774.82,2575 ; 754.82,4960 774.82,5020 ; 764.82,2575 784.82,2575 ; 764.82,5020 784.82,5020 ; 774.82,3670 774.82,2575 ; 774.82,3924.99 774.82,5020 ; 794.82,2635 774.82,2575 ; 794.82,4960 774.82,5020 ; 992.5,5155 992.5,5175 ; 1052.5,5145 992.5,5165 ; 1052.5,5185 992.5,5165 ; 2185.01,5165 992.5,5165 ; 2440,5165 3632.5,5165 ; 3572.5,5145 3632.5,5165 ; 3572.5,5185 3632.5,5165 ; 3632.5,5155 3632.5,5175 ; 1000,2555 1000,5015 3620,5015 3620,2555 1000,2555
  text "2640 (mil)" at 2195.01,5139.82 h60
  text "2445 (mil)" at 800,3680 h60 r90